# EAGLE board untitled (EAGLE 9.6.2)
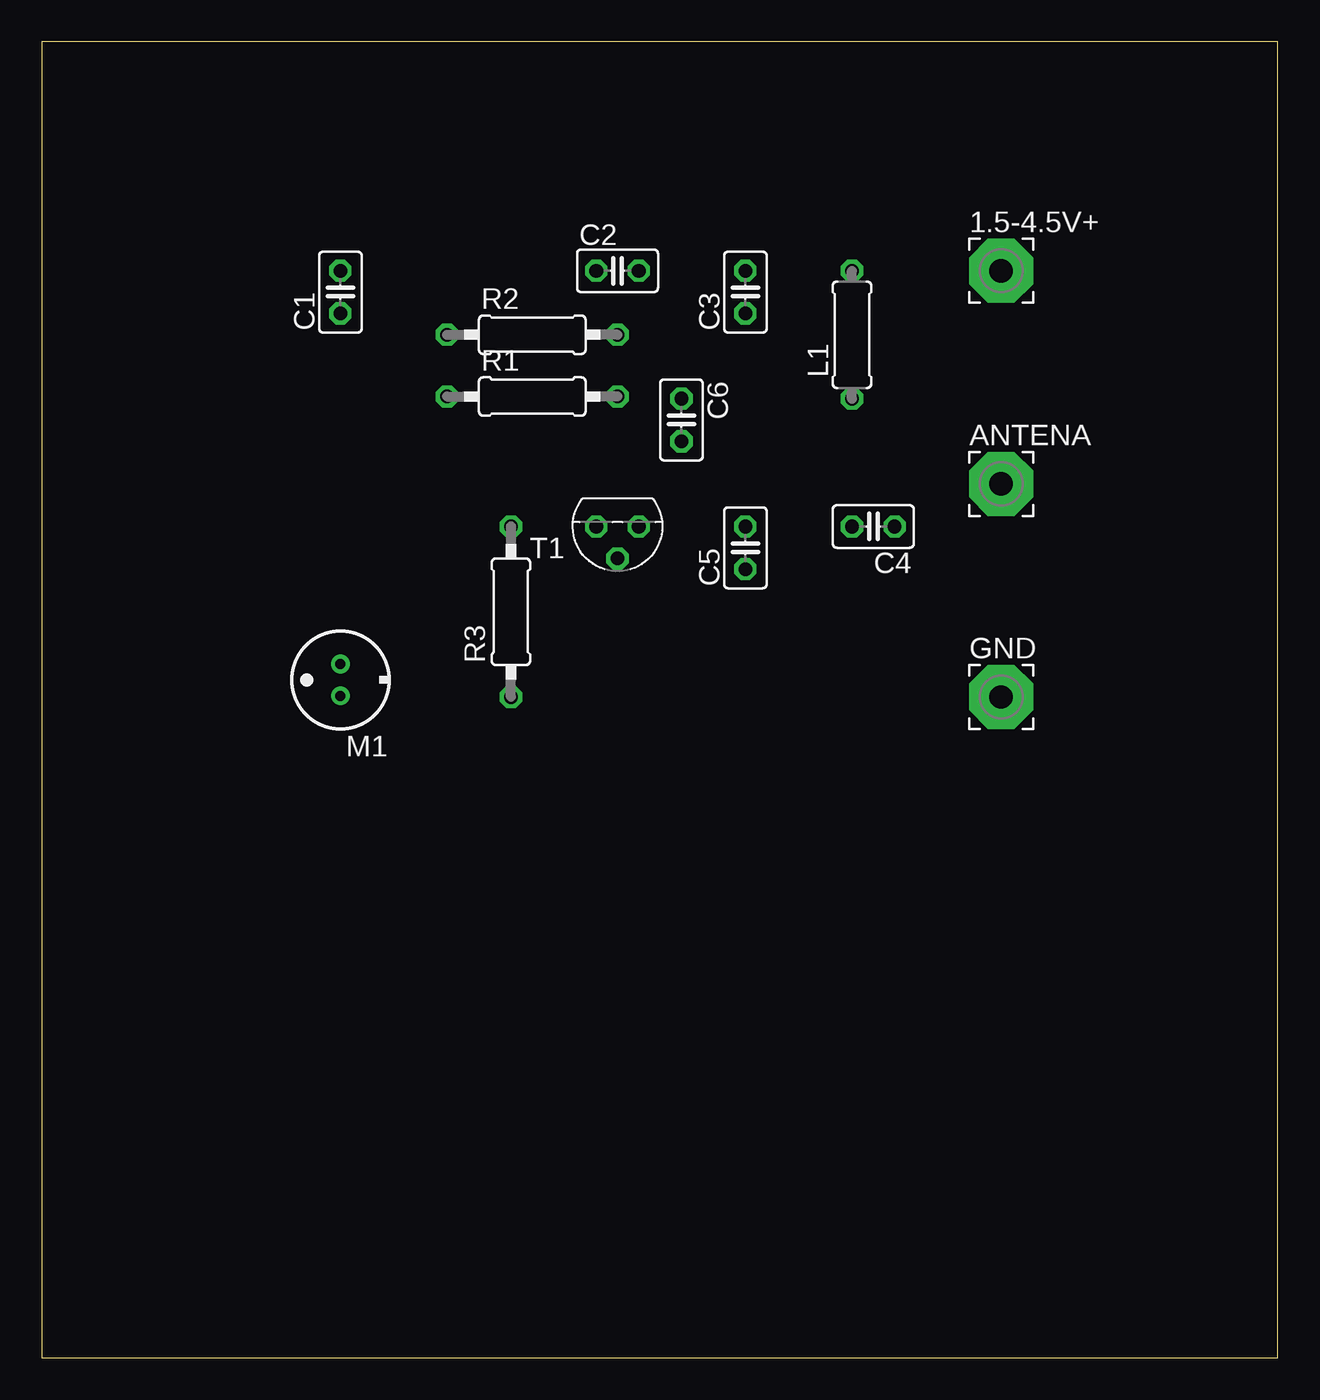
[diagram p0: board, top side]
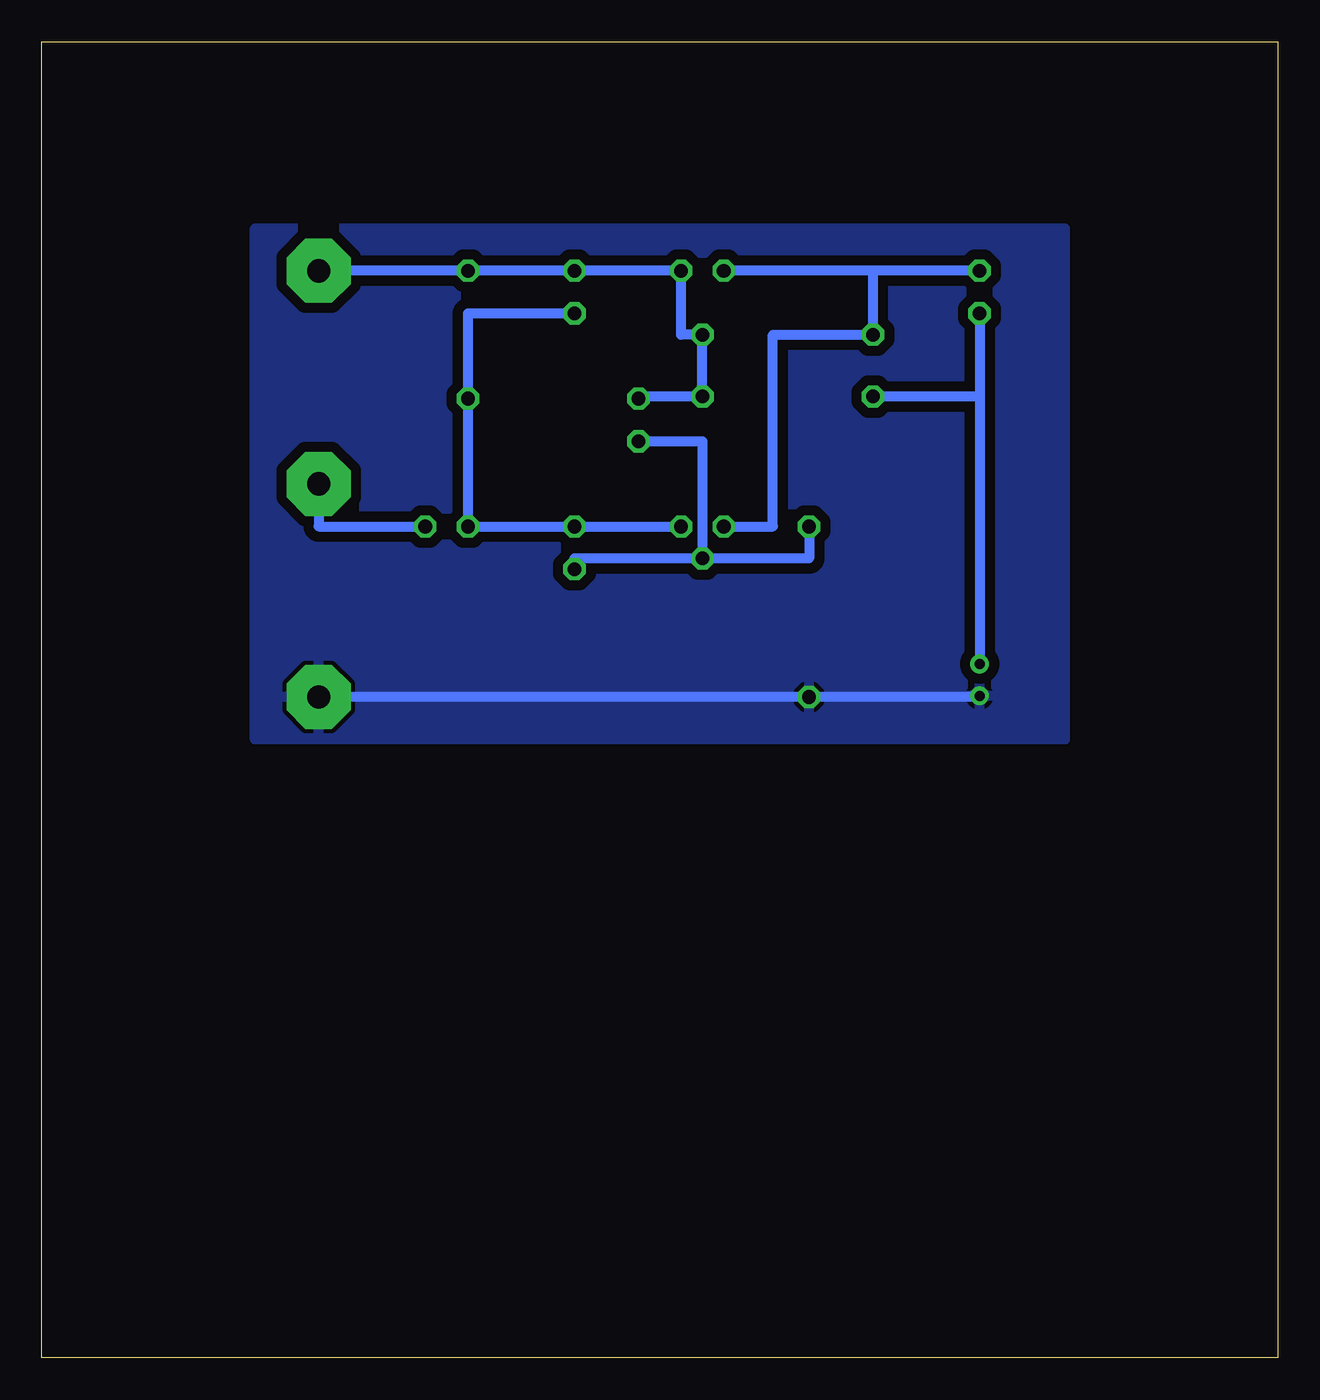
[diagram p1: board, bottom side, seen from below]

Size 73.64 x 78.41 mm. Coordinates in mm from the lower left corner, seen from the top.
Outline: 0,0 73.64,0 73.64,78.41 0,78.41 0,0
Copper layers (1*16): Top 0.035mm / dielectric 1.5mm / Bottom 0.035mm
Design rules "default": minimum track width 6mil, minimum drill 0.35mm, track to track 6mil, track to pad 6mil, pad to pad 6mil, via to via 6mil, smd to smd 6mil, copper to edge 40mil, drill to drill 6mil, minimum pad ring 10mil, minimum via ring 8mil, stop-mask expansion 4mil, vias tented up to drill 0mil, thermal gap 10mil

## Footprints (pad centres in the part's own frame; a part is rotated, then mirrored left to right if it is on the bottom)
3,81/1,4 = drill 1.397 pad 3.81 octagon: 1 0,0
C025-025X050 = drill 0.813 octagon: 1 -1.27,0; 2 1.27,0
0207/7 = drill 0.813 octagon: 1 -3.81,0; 2 3.81,0
WM-61B = drill 0.6 pad 1: 1 0,0.95; 2 0,-0.95
0207/10 = drill 0.813 octagon: 1 -5.08,0; 2 5.08,0
TO92 = drill 0.813 octagon: 1 1.27,0; 2 0,1.905; 3 -1.27,0

## Placement (x,y rotation side)
1.5-4.5V+  [3,81/1,4]  57.15,64.77 0 top
ANTENA  [3,81/1,4]  57.15,52.07 0 top
C1  47n  [C025-025X050]  17.78,63.5 90 top
C2  1n  [C025-025X050]  34.29,64.77 0 top
C3  39p  [C025-025X050]  41.91,63.5 90 top
C4  2p  [C025-025X050]  49.53,49.53 180 top
C5  5p  [C025-025X050]  41.91,48.26 90 top
C6  68p  [C025-025X050]  38.1,55.88 270 top
GND  [3,81/1,4]  57.15,39.37 0 top
L1  [0207/7]  48.26,60.96 90 top
M1  ELECTRET_MICROPHON-WM-61B  [WM-61B]  17.78,40.39 180 top
R1  1.8k  [0207/10]  29.21,57.28 0 top
R2  33k  [0207/10]  29.21,60.96 0 top
R3  150Ω  [0207/10]  27.94,44.45 90 top
T1  BF199  [TO92]  34.29,49.53 180 top

## Library data of the parts
1.5-4.5V+ ANTENA GND = wirepad
C1-C6 = rcl; SPICEPREFIX: C
L1 = rcl; SPICEPREFIX: L
M1 = microphon
R1-R3 = rcl; SPICEPREFIX: R
T1 = transistor-npn

## Nets
GND: GND.1 M1.1 R3.1
N$2: C1.1 M1.2 R1.1
N$3: C1.2 C2.1 R2.1 T1.1
N$5: C5.1 C6.2 R3.2 T1.2
N$6: C3.1 C4.2 C5.2 L1.1 T1.3
N$7: 1.5-4.5V+.1 C2.2 C3.2 C6.1 L1.2 R1.2 R2.2
N$8: ANTENA.1 C4.1

## Tracks (layer width: path | path; a pad name or v marks a point on that pad's centre or on a via)
GND
  Bottom 0.61: M1.1 17.78,39.37 R3.1 GND.1
  pour Bottom (isolate 0.61): 13.97,67.31 12.7,67.31 12.7,36.83 60.96,36.83 60.96,67.31
N$2
  Bottom 0.61: C1.1 17.78,57.28 | 17.78,57.28 R1.1 | 17.78,57.28 M1.2
N$3
  Bottom 0.61: C1.2 24.13,64.77 | 24.13,64.77 C2.1 | 24.13,64.77 R2.1 30.1,60.96 30.1,49.53 T1.1
N$5
  Bottom 0.61: R3.2 27.94,47.62 T1.2 | T1.2 41.91,47.62 C5.1 | C6.2 34.29,54.61 T1.2
N$6
  Bottom 0.61: C3.1 48.26,62.23 L1.1 C4.2 C5.2 T1.3
N$7
  Bottom 0.61: C6.1 38.1,57.28 R1.2 R2.2 35.56,60.96 C2.2 C3.2 L1.2 1.5-4.5V+.1
N$8
  Bottom 0.61: ANTENA.1 57.15,49.53 C4.1